# EAGLE board driverMotor (EAGLE 9.6.2)
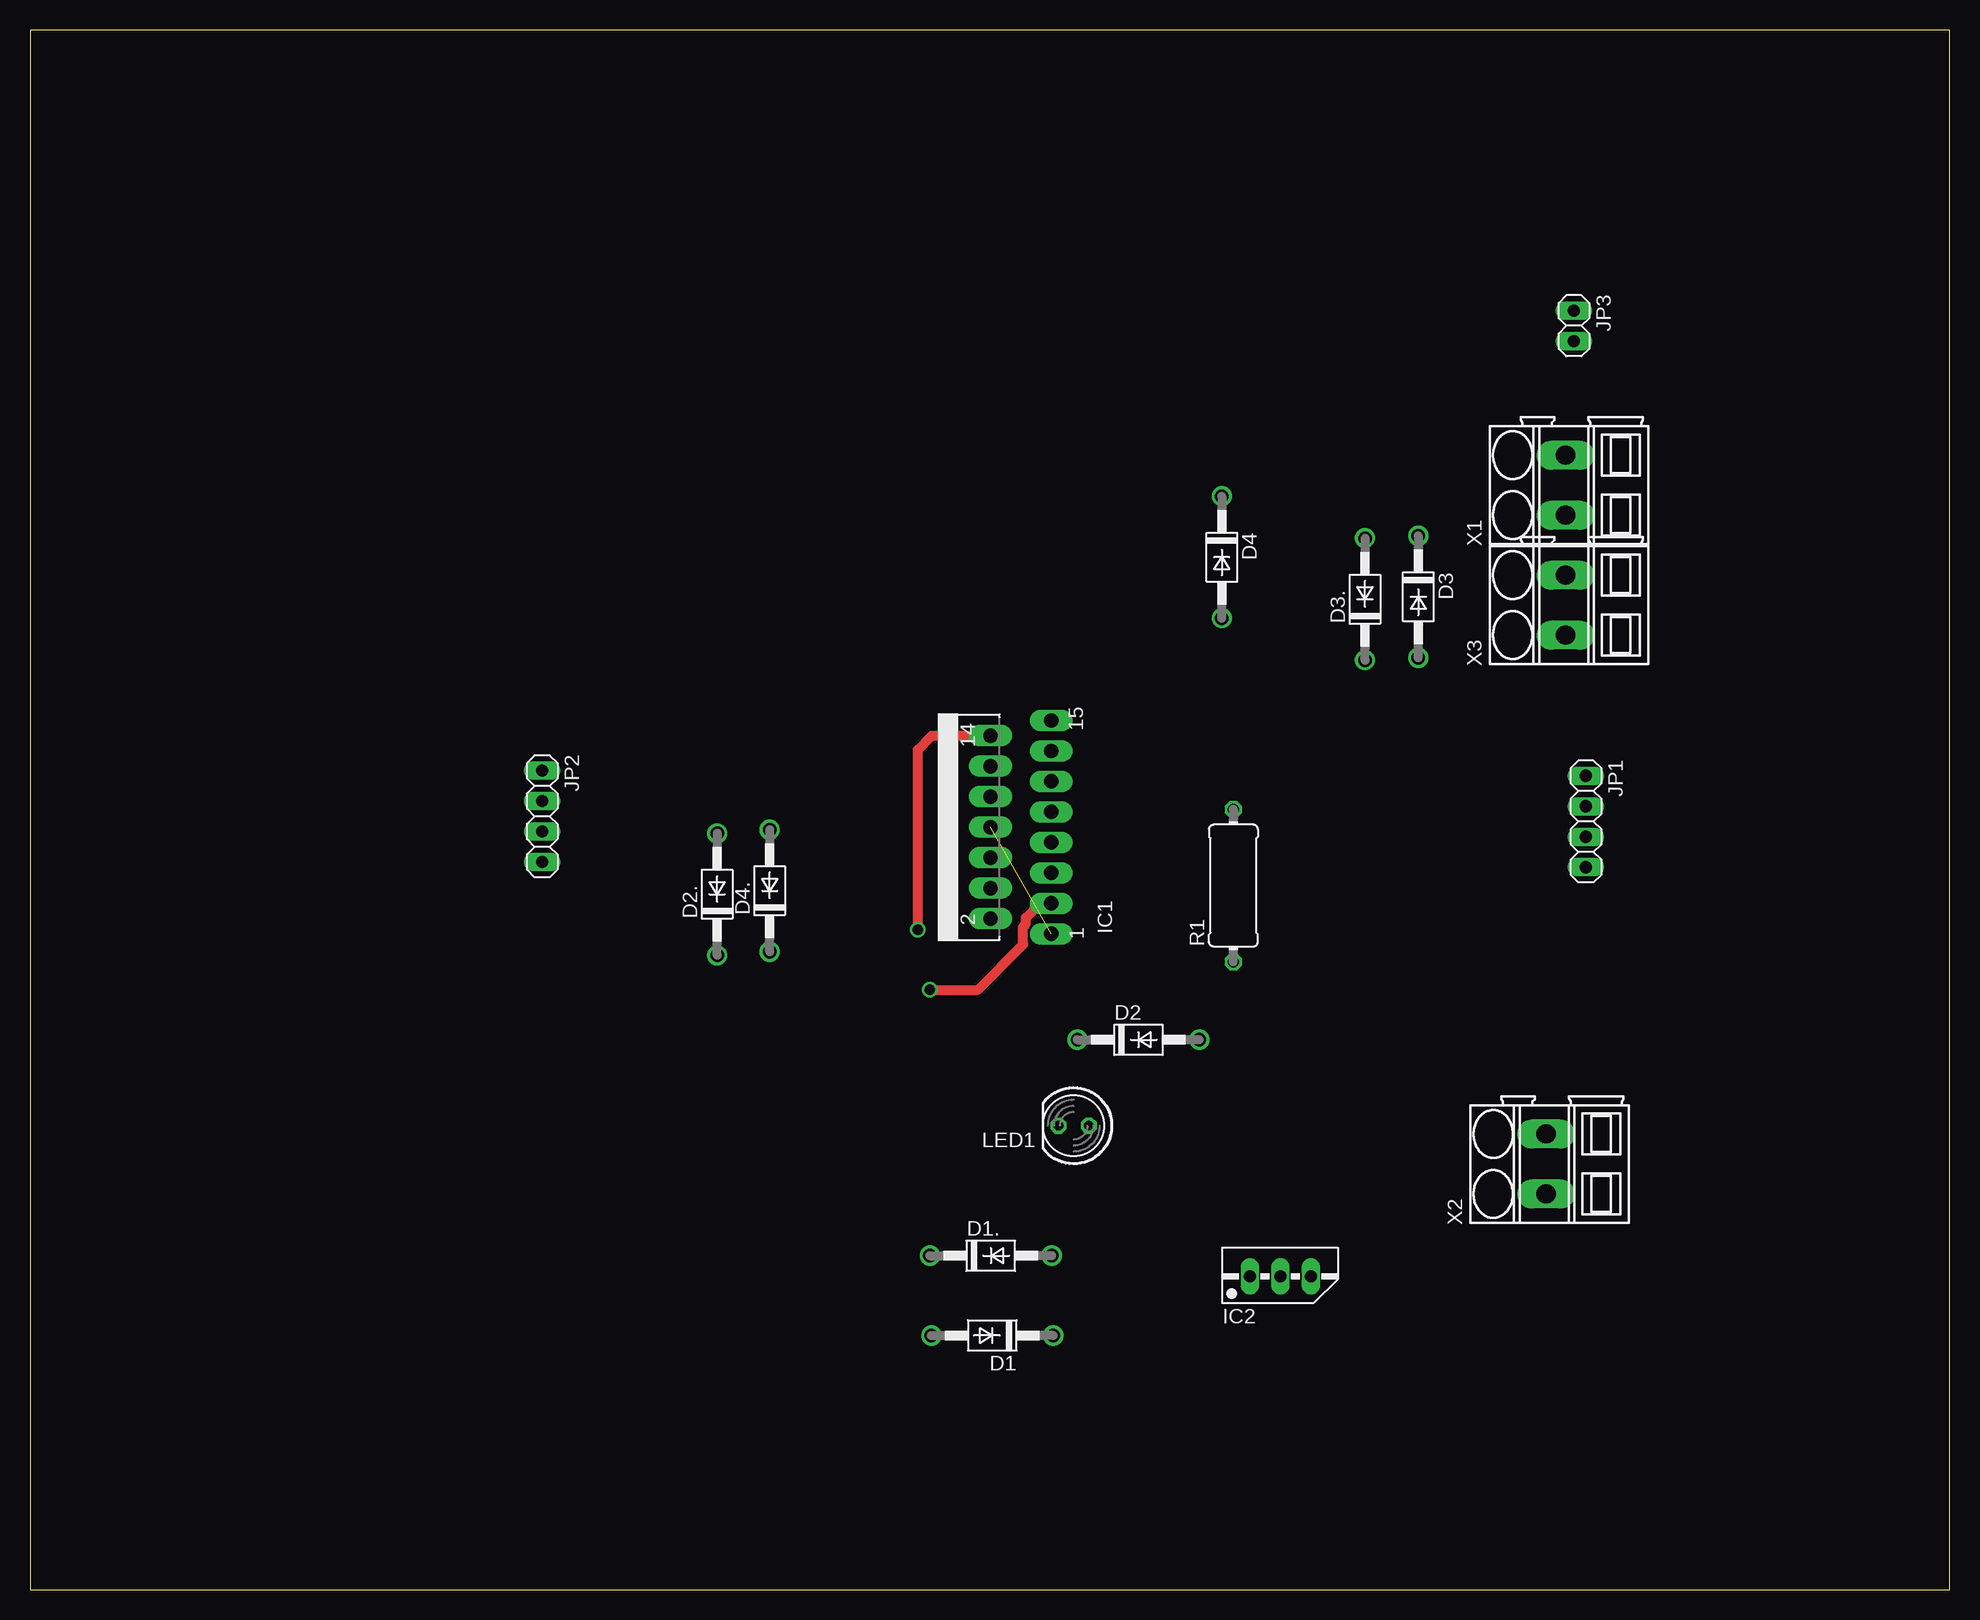
[diagram p0: board, top side]
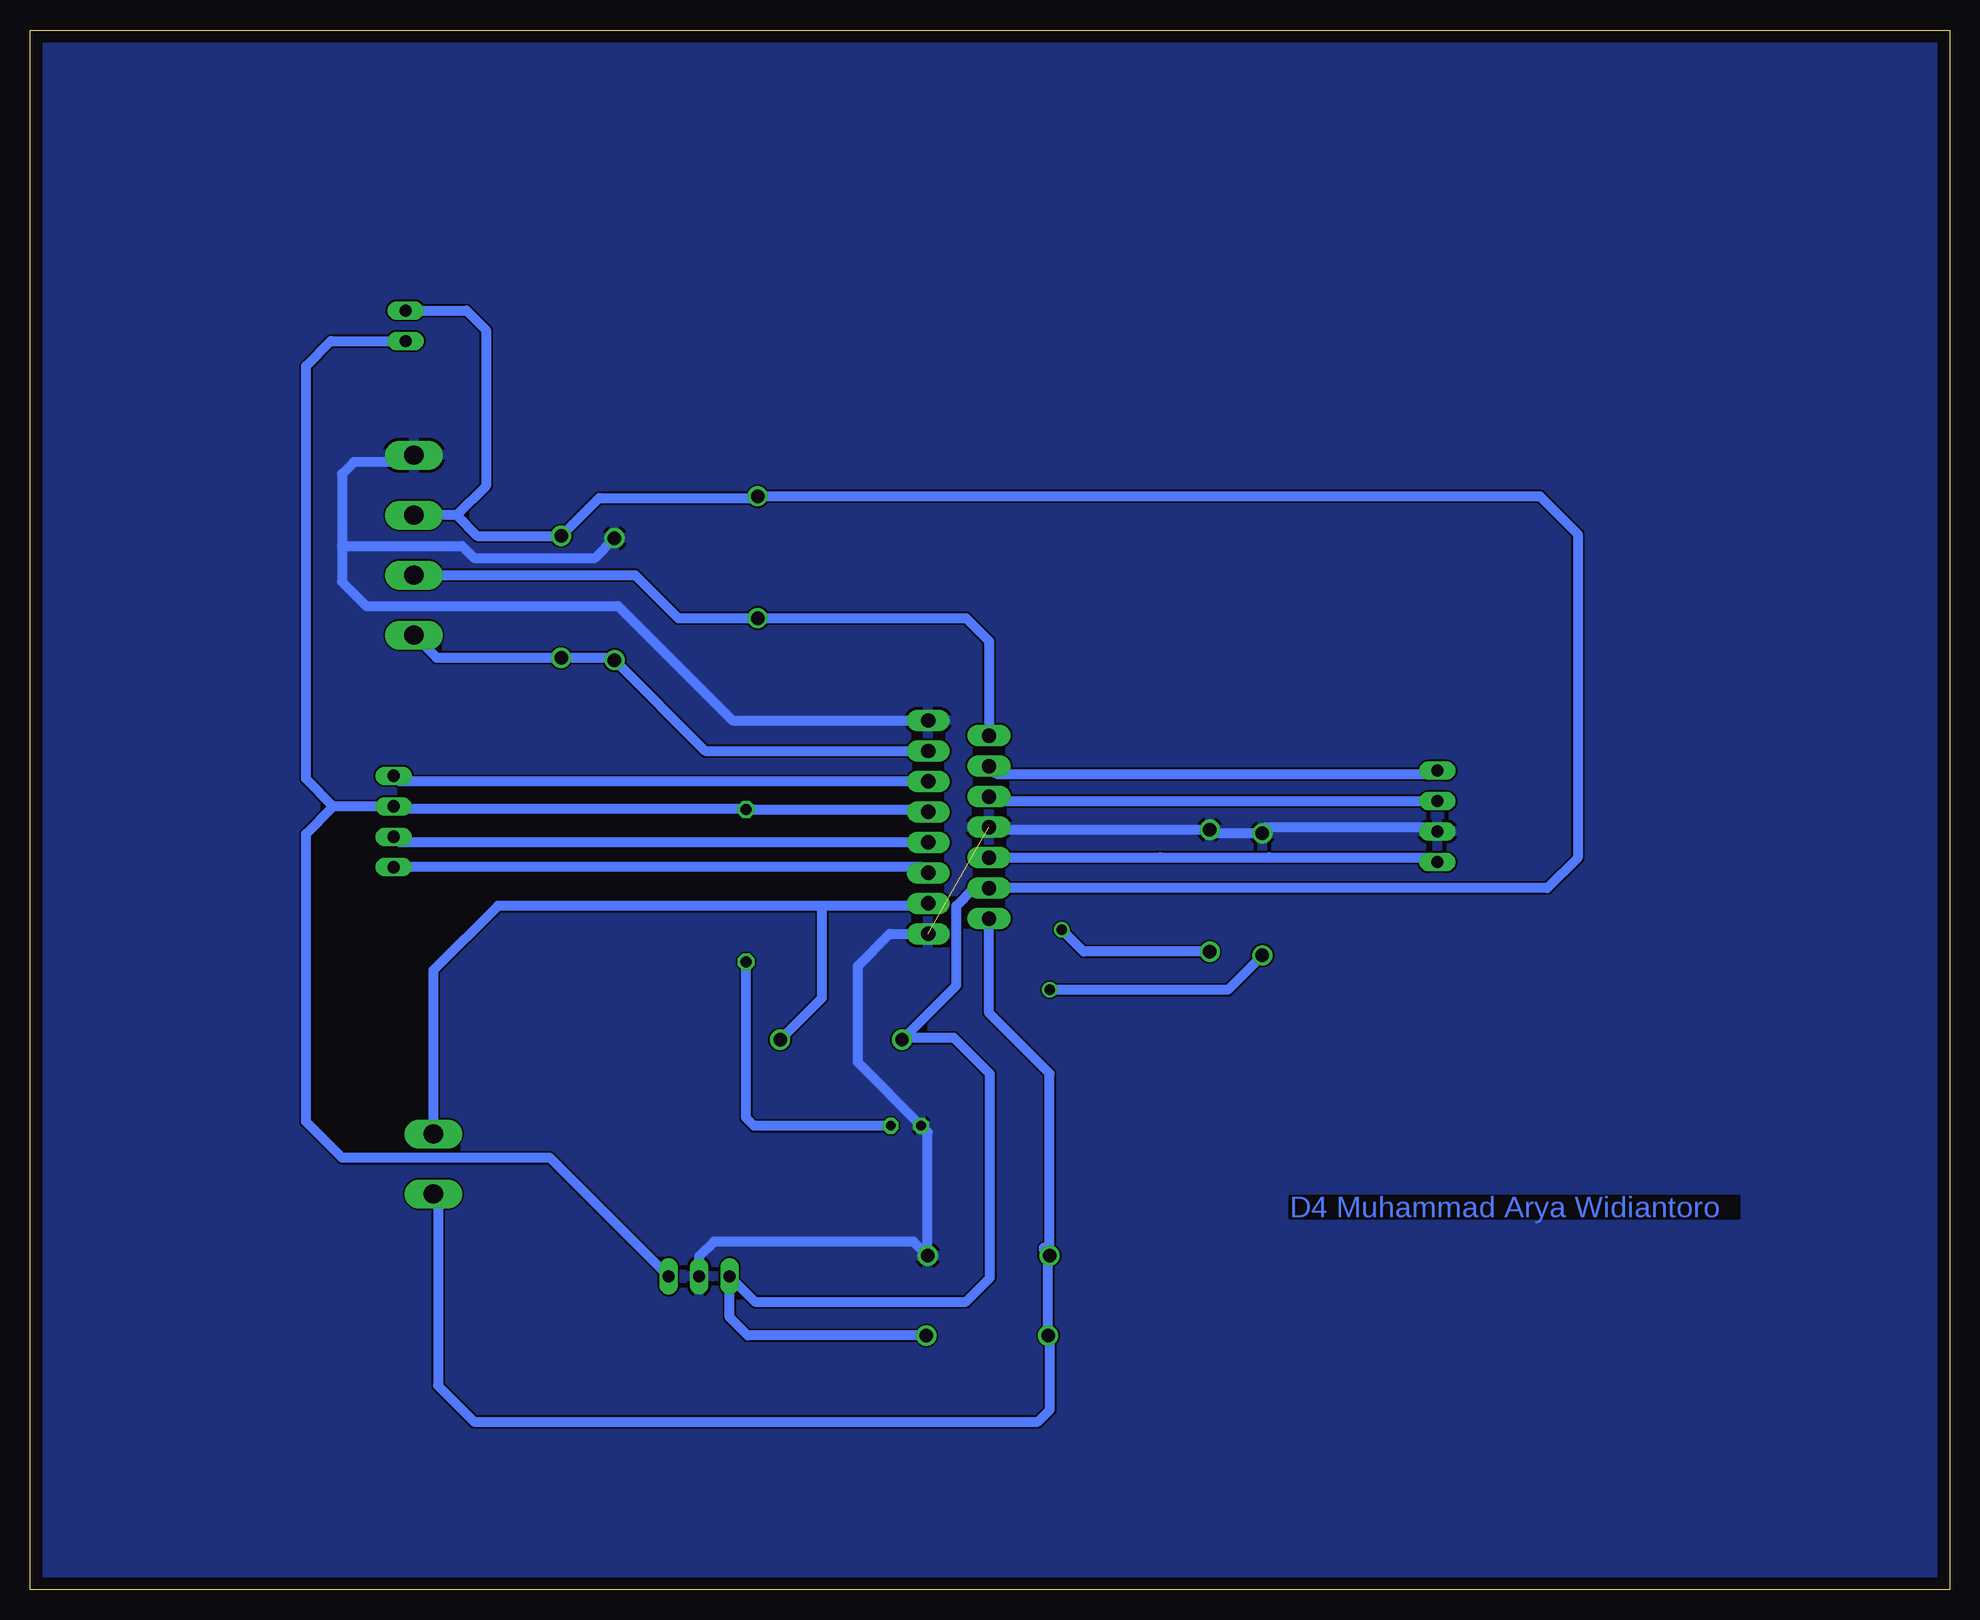
[diagram p1: board, bottom side, seen from below]

Size 160 x 130 mm. Coordinates in mm from the lower left corner, seen from the top.
Outline: 0,0 160,0 160,130 0,130 0,0
Copper layers (1*16): Top 0.035mm / dielectric 1.5mm / Bottom 0.035mm
Design rules "default": minimum track width 6mil, minimum drill 0.35mm, track to track 6mil, track to pad 6mil, pad to pad 6mil, via to via 6mil, smd to smd 6mil, copper to edge 40mil, drill to drill 6mil, minimum pad ring 10mil, minimum via ring 8mil, stop-mask expansion 4mil, vias tented up to drill 0mil, thermal gap 10mil

## Footprints (pad centres in the part's own frame; a part is rotated, then mirrored left to right if it is on the bottom)
DO41-10 = drill 1.118: A 5.08,0; C -5.08,0
MULTIWATT-15 = drill 1.2 long: 1 -8.89,-7.62; 2 -7.62,-2.54; 3 -6.35,-7.62; 4 -5.08,-2.54; 5 -3.81,-7.62; 6 -2.54,-2.54; 7 -1.27,-7.62; 8 0,-2.54; 9 1.27,-7.62; 10 2.54,-2.54; 11 3.81,-7.62; 12 5.08,-2.54; 13 6.35,-7.62; 14 7.62,-2.54; 15 8.89,-7.62
78MXXS = drill 1.016 long: GND 0,-2.54; IN -2.54,-2.54; OUT 2.54,-2.54
1X04 = drill 1.016 long: 1 -3.81,0; 2 -1.27,0; 3 1.27,0; 4 3.81,0
1X02 = drill 1.016 long: 1 -1.27,0; 2 1.27,0
LED5MM = drill 0.813 octagon: A -1.27,0; K 1.27,0
0411/12 = drill 0.914 octagon: 1 -6.35,0; 2 6.35,0
SMKDSP_1,5/2 = drill 1.6 pad 1.8 long: 1 -2.5,0; 2 2.5,0

## Placement (x,y rotation side)
D1  1N4004  [DO41-10]  80.21,21.17 180 top
D1.  1N4004  [DO41-10]  80.09,27.83 0 top
D2  1N4004  [DO41-10]  92.39,45.83 0 top
D2.  1N4004  [DO41-10]  57.28,57.95 90 top
D3  1N4004  [DO41-10]  115.72,82.75 270 top
D3.  1N4004  [DO41-10]  111.28,82.55 90 top
D4  1N4004  [DO41-10]  99.34,86.05 270 top
D4.  1N4004  [DO41-10]  61.66,58.25 90 top
IC1  L298  [MULTIWATT-15]  77.52,63.55 90 top
IC2  [78MXXS]  104.22,28.64 0 top
JP1  [1X04]  129.69,64.02 270 top
JP2  [1X04]  42.69,64.45 270 top
JP3  [1X02]  128.69,105.34 270 top
LED1  [LED5MM]  86.99,38.66 180 top
R1  [0411/12]  100.31,58.68 90 top
X1  SMKDSP_1,5/2  [SMKDSP_1,5/2]  128,92.06 90 top
X2  SMKDSP_1,5/2  [SMKDSP_1,5/2]  126.38,35.47 90 top
X3  SMKDSP_1,5/2  [SMKDSP_1,5/2]  128,82.06 90 top

## Library data of the parts
D1 D1. D2 D2. D3 D3. D4 D4. = diode
IC1 = st-microelectronics
IC2 = v-reg
JP1-JP3 = pinhead
LED1 = led
R1 = resistor
X1-X3 = con-phoenix-smkdsp; MF: FARNELL; MPN: 1733570; OC_FARNELL: 3041244; OC_NEWARK: 69C8588

## Nets
+5V: IC1.9 IC2.OUT JP1.2 JP3.2 R1.2
ENABLE_A: IC1.6 JP2.4
ENABLE_B: IC1.11 JP1.1
GND: D1..A D2..A D3..A D4..A IC1.1 IC1.8 IC1.15 IC2.GND JP2.3 LED1.K X1.2
INPUT1: IC1.5 JP1.4
INPUT2: IC1.7 JP1.3
INPUT3: IC1.10 JP2.2
INPUT4: IC1.12 JP2.1
LED: LED1.A R1.1
MOTOR1_1: D1..C D1.A IC1.2 X2.1
MOTOR1_2: D2..C D2.A IC1.3 X2.2
MOTOR2_1: D3..C D3.A IC1.13 X3.1
MOTOR2_2: D4..C D4.A IC1.14 X3.2
VS: D1.C D2.C D3.C D4.C IC1.4 IC2.IN JP3.1 X1.1

## Tracks (layer width: path | path; a pad name or v marks a point on that pad's centre or on a via)
+5V
  Bottom 0.813: IC1.9 85.35,65.03 R1.2 100.35,65.07 129.47,65.07 JP1.2 134.71,65.29 | IC2.OUT 116.66,36 134,36 137,39 137,63 134.71,65.29 | 134.71,65.29 137,67.58 137,102 134.93,104.07 JP3.2
ENABLE_A
  Bottom 0.813: JP2.4 43.06,61.01 56.68,61.01 56.7,61.03 65.8,61.03 65.82,61.01 IC1.6
ENABLE_B
  Bottom 0.813: IC1.11 129.22,67.36 JP1.1
GND  (1 unrouted)
  Bottom 0.813: 57,63.55 43.06,63.55 JP2.3 | D2..A 61.36,63.03 D4..A 79.84,63.33 IC1.8 | IC2.GND 104.22,27.78 103,29 86.34,29 D1..A 85.17,38.11 LED1.K 91,43.94 91,52 88.34,54.66 IC1.1 | X1.2 128.56,94 133,94 134,93 134,87 | IC1.15 101.44,72.44 111,82 132,82 134,84 134,87 | D3..A 112.91,86 123,86 124,87 134,87
  pour Bottom: 1,129 1,0 159,0 160,1 160,130 2,130
INPUT1
  Bottom 0.813: IC1.5 85.61,60.21 JP1.4
INPUT2
  Bottom 0.813: IC1.7 129.22,62.28 JP1.3
INPUT3
  Bottom 0.813: IC1.10 79.69,65.72 JP2.2
INPUT4
  Bottom 0.813: IC1.12 79.43,68 42,68 42.26,68.26 JP2.1
LED
  Bottom 0.813: LED1.A 99.66,38.66 100.31,39.31 R1.1
MOTOR1_1
  Bottom 0.813: X2.1 126,32.59 126,17 123,14 76,14 75,15 75,21.04 D1.A 75.13,27.87 75,28 75.5,28.5 75.5,28.32 D1..C 75.01,43.01 80.06,48.06 IC1.2
MOTOR1_2  (via drill 0.85)
  Top 0.813: v75,50 79,50 82.78,53.78 82.78,55.26 83,55.48 83,56 84.2,57.2 IC1.3
  Bottom 0.813: IC1.3 85.34,57 94,57 | 94,57 121,57 126.38,51.62 X2.2 | D2.A 94,49.3 94,57 | D2..C 60.15,50 v75,50
MOTOR2_1
  Bottom 0.813: 86,70 85.24,70 IC1.13 103.71,69.9 D3..C 111.48,77.67 D3.A 126.11,77.67 X3.1
MOTOR2_2  (via drill 0.85)
  Top 0.813: v74,55 74,70 75.17,71.17 IC1.14
  Bottom 0.813: X3.2 109.56,84.56 105.97,80.97 D4.A 81.97,80.97 80.06,79.06 IC1.14 | D4..C 72.17,53.17 v74,55
VS
  Bottom 0.813: D1.C 100.17,21.17 101.68,22.68 IC2.IN 99.58,24 82,24 80,26 80,43 83,46 87.14,46 D2.C 82.78,50.36 82.78,57 81.31,58.47 IC1.4 33.53,58.47 31,61 31,88 34.13,91.13 D4.C 99.47,91 112.55,91 D3.C 122.71,87.83 124.44,89.56 | JP3.1 123.61,106.61 122,105 122,92 124.44,89.56 | 124.44,89.56 X1.1

## Text on the board
Bottom: D4 Muhammad Arya Widiantoro